# Altium PCB cam_FX3.PcbDoc (part 2 of 2)
Units mm, origin at the board's own origin, x right, y up, seen from the top; angles counter-clockwise.
Board outline 27 x 27 mm, 6 copper layers (Signal_T, GND_T, PWR, Signal_INT, GND_B, Signal_B), stack 0.816 mm thick; 79 components, 95 nets, 507 pads, 300 vias.
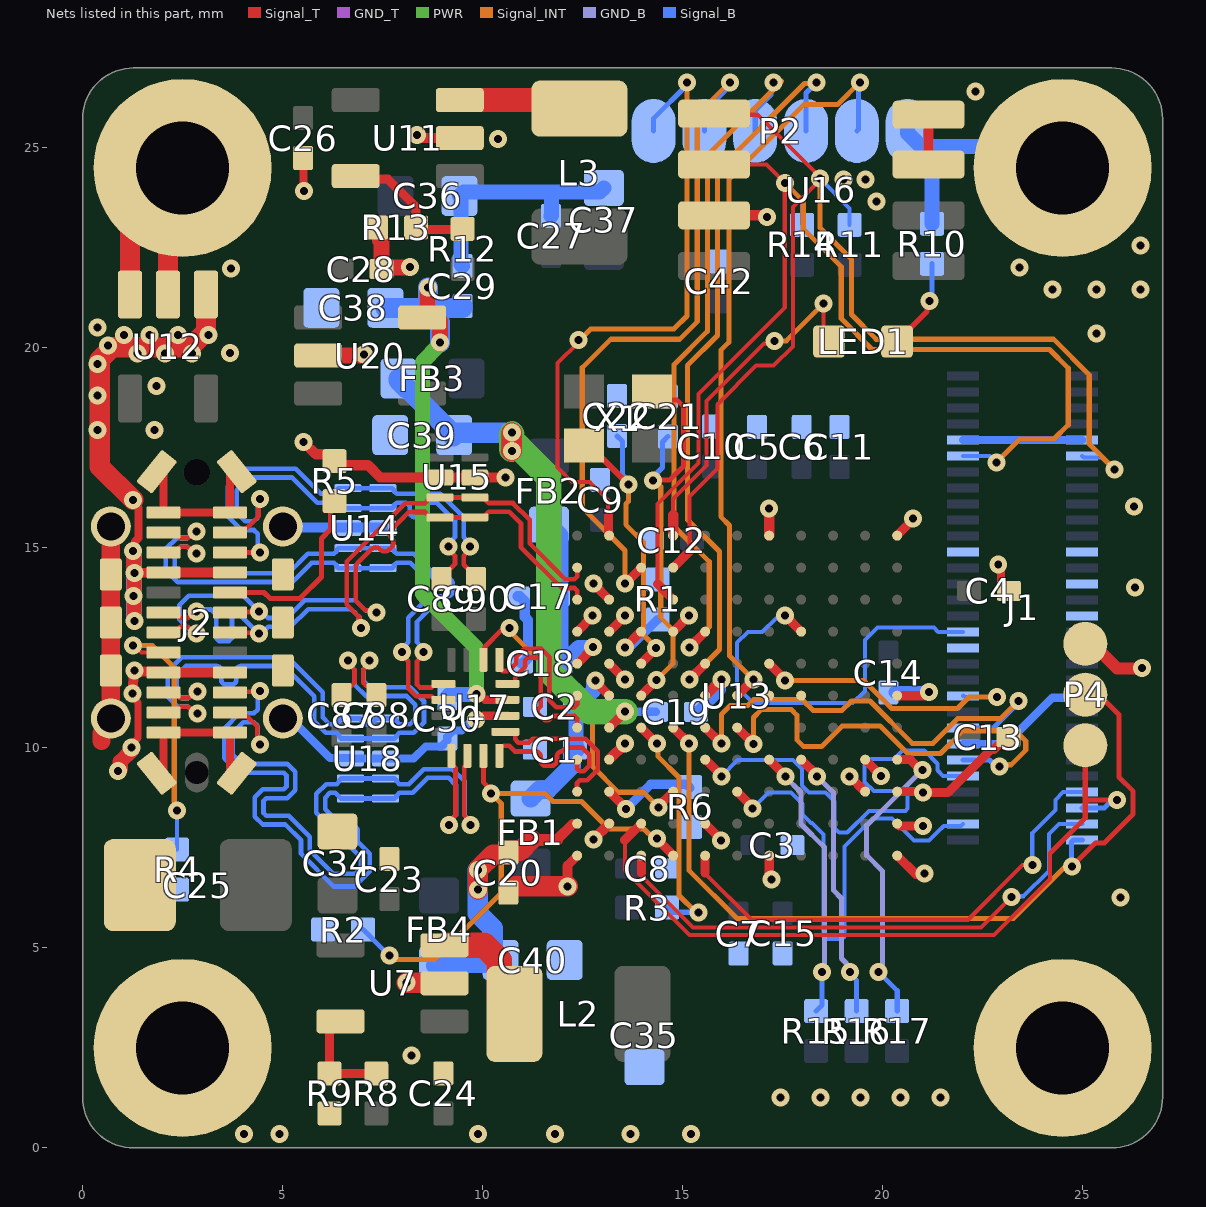
[diagram p6: the nets of this part, all layers, seen from the top]

## Via types
v1: diameter 0.45, hole 0.2, Signal_T to Signal_B, tented both sides, 300 vias

## Nets (pads, with @x,y where several pads share a name; then routed paths per layer and width w, separated by ;. In a path a pad name is that pad's centre, name@x,y a point inside that pad or via, vN(x,y) a via of type N, cw(c..) or ccw(c..) an arc to the next point about the centre after c; other vN are vias at no path point) (continued)
FPGA_D27: J1.4 U13.F3 | length 12.1
  Signal_T w0.229: U13.F3@16.364,8.909 16.364,8.904 16.751,8.517 v1(16.751,8.491)
  Signal_B w0.102: v1(16.751,8.491) 17.15,8.89 17.704,8.89 17.997,8.596 17.997,8.336 18.212,8.121 18.239,8.121 18.527,7.833 18.527,5.281 18.586,5.222 18.983,5.222 19.043,5.281 19.043,7.537 19.742,8.236 20.231,8.236 20.782,7.685 21.158,7.685 21.373,7.9 21.528,8.055 21.965,8.055 J1.4@22.01,8.1
FPGA_D28: J1.12 U13.F5 | length 11.7
  Signal_T w0.229: U13.F5@16.368,10.512 16.368,10.507 v1(16.772,10.104)
  Signal_INT w0.127: v1(16.772,10.104) 16.772,10.762 16.967,10.958 17.719,10.958 17.856,10.82 17.856,10.205 18.028,10.034 18.474,10.034 18.991,10.551 19.938,10.551 20.625,9.863 21.446,9.863 22.014,10.431 23.321,10.431 23.579,10.174 23.579,9.946 23.213,9.581 22.972,9.581 v1(22.926,9.535)
  Signal_B w0.127: J1.12@22.01,9.7 22.673,9.7 22.838,9.535 v1(22.926,9.535)
FPGA_D29: J1.7 U13.E1 | length 12.7
  Signal_T w0.102: U13.E1@15.564,7.309 15.564,6.864 16.722,5.706 22.129,5.706 23.499,7.076 v1(23.741,7.076)
  Signal_T w0.229: 15.562,6.881 U13.E1@15.562,7.301
  Signal_B w0.102: v1(23.741,7.076) 23.741,7.874 24.317,8.45 24.317,8.703 24.514,8.9 J1.7@24.99,8.9
FPGA_D30: J1.16 U13.E5 | length 11.6
  Signal_T w0.229: U13.E5@15.568,10.506 v1@15.959,10.114
  Signal_INT w0.127: v1(15.972,10.114) 15.972,10.841 16.193,11.062 16.629,11.062 16.778,11.212 17.987,11.212 18.263,10.935 18.981,10.935 19.221,11.175 19.682,11.175 20.74,10.117 21.26,10.117 21.878,10.735 22.953,10.735 v1(23.393,11.176)
  Signal_B w0.127: J1.16@22.01,10.5 22.768,10.5 23.393,11.125 v1(23.393,11.176)
FPGA_D31: J1.10 U13.E4 | length 12
  Signal_T w0.229: U13.E4@15.575,9.702 v1@15.974,9.303
  Signal_B w0.102: v1(15.974,9.293) 16.377,9.696 17.761,9.696 17.983,9.474 17.983,9.068 18.161,8.89 18.567,8.89 18.796,8.661 18.796,8.001 18.915,7.882 19.116,7.882 19.662,8.429 20.567,8.429 20.627,8.488 20.627,8.867 20.567,8.927 19.779,8.927 19.552,9.153 19.552,9.558 19.716,9.721 20.288,9.721 20.499,9.932 21.041,9.932 21.367,9.606 21.367,9.443 21.511,9.3 J1.10@22.01,9.3
FX3_SSRX_N: U13.A3 U17.1 | length 4
  Signal_T w0.117: U17.1@10.567,10.402 10.771,10.402 10.812,10.36 10.812,10.217 10.896,10.134 11.158,10.134 11.259,10.234 12.569,10.234 12.881,9.922 12.881,9.46 12.618,9.197 12.43,9.197 12.361,9.128 U13.A3@12.361,8.906
FX3_SSRX_P: U13.A4 U17.16 | length 4
  Signal_T w0.117: U17.16@10.417,9.802 10.417,10.002 10.458,10.043 10.515,10.043 10.527,10.055 10.664,10.055 10.805,9.915 11.311,9.915 ; 11.311,9.915 cw(c11.311,9.773) 11.453,9.773 11.453,9.682 ccw(c11.581,9.682) 11.581,9.554 11.712,9.554 ccw(c11.712,9.701) 11.858,9.701 11.858,9.786 cw(c11.992,9.786) 11.992,9.919 12.087,10.015 12.478,10.015 12.662,9.831 12.662,9.551 12.527,9.416 12.43,9.416 12.361,9.484 U13.A4@12.361,9.706
FX3_SSTX_N: U13.A6 U17.5 | length 4
  Signal_T w0.117: U17.5@10.42,12.205 10.42,12.005 10.499,11.927 10.65,11.927 10.842,12.118 10.842,12.285 11.039,12.482 11.472,12.482 11.669,12.285 11.669,11.194 11.844,11.019 12.296,11.019 12.364,11.088 U13.A6@12.364,11.309
FX3_SSTX_P: U13.A5 U17.4 | length 4
  Signal_T w0.117: U17.4@10.62,11.605 10.778,11.605 10.819,11.646 10.819,11.786 10.869,11.836 11.061,12.027 11.061,12.194 11.129,12.263 11.381,12.263 11.45,12.194 11.45,11.043 11.378,10.971 11.378,10.869 11.55,10.696 11.65,10.696 11.754,10.8 12.296,10.8 12.364,10.731 U13.A5@12.364,10.509
GND: C1.1 C2.1 C3.1 C4.1 C5.1 C6.1 C7.1 C8.1 C9.1 C10.1 C11.1 C12.1 C13.1 C14.1 C15.1 C17.1 C18.1 C19.1 C20.1 C21.2 C22.2 C23.1 C24.1 C25.2 C26.1 C27.1 C28.1 C29.1 C30.1 C34.2 C35.2 C36.2 C37.2 C38.2 C39.2 C40.2 C42.1 J1.14 J1.19 J1.25 J1.26 J1.29 J1.33 J1.37 J1.38 J1.51 J1.52 J2.0 J2.A1 J2.A12 J2.B1 J2.B12 P2.1 P4.3 pad.Q5 pad.Q6 pad.Q7 pad.Q8 R1.1 R2.2 R4.2 R5.2 R6.1 R9.2 R10.2 R13.1 U7.2 U11.2 U12.2 U12.3 U13.A1 U13.A8 U13.B2 U13.B4 U13.B7 U13.B8 U13.B9 U13.D8 U13.E2 U13.E6 U13.G1 U13.G11 U13.K3 U13.K4 U13.L1 U13.L2 U13.L3 U13.L6 U13.L11 U14.3 U14.8 U15.3 U15.8 U16.3 U16.4 U16.7 U17.2 U18.3 U18.8 U20.2 | length 83.5
  Signal_T w0.203: J2.0@1.853,9.369 2.023,9.369 J2.B1@2.023,10.389 J2.A12@3.683,10.389 3.683,9.369 J2.0@3.853,9.369 ; J2.0@1.853,16.909 2.023,16.909 J2.B12@2.023,15.889 J2.A1@3.683,15.889 3.683,16.909 J2.0@3.853,16.909 ; C26.1@5.512,24.748 5.524,24.735 5.524,23.939 v1(5.537,23.927) ; v1@9.854,10.707 9.921,10.707 10.019,10.805 U17.2@10.62,10.805 ; v1(22.89,14.589) 22.89,14.522 22.957,14.455 22.957,14.078 23.029,14.006 C4.1@23.155,14.006
  Signal_T w0.229: 12.124,7.045 12.124,7.069 U13.A1@12.364,7.309 ; U13.A8@12.364,12.909 v1@12.745,13.29 ; v1@12.771,14.103 U13.B9@13.164,13.709 ; U13.B4@13.164,9.709 U13.B4@13.184,9.709 ; U13.B7@13.164,12.109 13.558,11.716 v1@13.583,11.716 ; U13.B8@13.164,12.909 13.562,13.307 v1(13.562,13.309) v1@13.562,13.315 ; U13.D8@14.764,12.909 15.146,13.291 v1@15.158,13.291 ; U13.E2@15.564,8.109 15.564,8.104 15.964,7.704 v1(15.964,7.687) ; U13.G1@17.164,7.309 17.166,7.308 17.166,6.822 17.216,6.772 v1(17.216,6.712) ; v1(19.171,9.29) 19.178,9.29 19.559,8.909 U13.K3@19.564,8.909 ; U13.K4@19.564,9.709 19.564,9.704 19.955,9.313 v1(19.955,9.294) ; U13.L1@20.364,7.309 20.834,6.84 21.023,6.84 v1(21.041,6.858) ; U13.L2@20.364,8.109 20.422,8.052 v1(21.006,8.052) ; U13.L3@20.364,8.909 20.368,8.913 20.982,8.913 v1(21.006,8.89) 21.641,8.89 22.716,9.965 22.783,9.965 23.092,10.274 C13.1@23.142,10.274 ; U13.L6@20.364,11.309 20.369,11.305 21.021,11.305 v1@21.026,11.3 ; U13.L11@20.364,15.309 20.364,15.315 20.756,15.707 v1(20.756,15.733)
  Signal_T w0.254: v1(5.523,17.651) 5.831,17.343 6.126,17.343 R5.2@6.299,17.17 6.401,17.069 7.137,17.069 7.442,16.764 U15.3@8.93,16.764 U15.8@9.804,16.764 v1(10.566,16.764) ; v1(8.357,25.324) 8.41,25.324 8.486,25.248 U11.2@9.428,25.248 ; v1(12.124,6.541) 12.124,7.045 ; v1(12.771,7.709) 12.771,7.716 U13.B2@13.164,8.109 ; U13.B4@13.169,9.717 v1@13.562,10.11 ; U13.E6@15.574,11.313 v1@15.968,11.706 ; U16.7@15.786,23.317 17.006,23.317 17.054,23.269 v1(17.107,23.269) ; v1(17.16,15.991) 17.164,15.987 U13.G11@17.164,15.309 ; U16.3@21.146,24.587 U16.4@21.146,25.832
  Signal_T w0.3: P4.3@25.066,12.605 25.248,12.605 25.864,11.989 26.481,11.989 v1(26.488,11.997)
  Signal_T w0.4: U20.2@5.888,19.812 6.997,19.812 7.022,19.837 v1(7.036,19.837) ; R13.1@7.337,22.988 7.437,22.888 7.437,22.688 7.468,22.658 C28.1@7.468,21.999 ; C28.1@7.468,21.974 7.506,22.012 8.169,22.012 v1(8.179,22.022)
  Signal_T w0.457: 0.472,10.181 J2.0@0.472,10.361 ; J2.0@0.703,10.592 J2.0@0.703,10.739 J2.0@0.703,11.939 J2.0@0.703,13.139 J2.0@0.703,14.339 J2.0@0.703,15.539
  Signal_T w0.5: U12.3@1.184,21.341 1.184,23.184 cw(c2.134,23.184) 2.134,24.134 U12.2@2.134,21.341
  Signal_T w0.508: v1(8.099,4.133) 9.047,4.133 U7.2@9.047,4.116 ; C20.1@10.643,6.383 10.643,6.425 10.647,6.429 10.689,6.429 10.8,6.541 v1(12.124,6.541)
  Signal_B w0.203: J2.0@5.003,10.739 5.197,10.739 6.183,9.752 6.68,9.752 U18.3@6.695,9.738 U18.8@7.569,9.738 8.277,9.738 8.577,10.038 8.968,10.038 9.116,10.186 C30.1@9.116,10.236 9.116,10.286 9.265,10.435 9.478,10.435 9.703,10.66 9.782,10.66 v1(9.829,10.707) ; C14.1@20.295,11.387 C14.1@20.303,11.396 ; v1@21.116,11.396 21.158,11.354 v1(21.158,11.405) ; J1.14@22.01,10.1 23.089,10.1 24.246,11.258 24.948,11.258 J1.19@24.99,11.3 ; J1.52@22.01,17.7 J1.51@24.99,17.7
  Signal_B w0.254: J2.0@5.003,15.539 5.025,15.516 7.481,15.516 U14.3@7.503,15.494 ; C17.1@10.879,13.792 10.929,13.792 11.052,13.669 11.052,13.281 11.13,13.203 11.13,12.388 11.128,12.386 11.128,12.239 11.005,12.116 C18.1@10.955,12.116
  Signal_B w0.3: C19.1@15.336,10.903 15.386,10.903 15.939,11.457 15.939,11.684 v1(15.968,11.713)
  Signal_B w0.305: C14.1@20.303,11.396 v1@21.116,11.396
  Signal_B w0.381: C29.1@9.5,22.048 9.461,22.086 9.461,23.762 C36.2@9.423,23.8 9.525,23.901 11.721,23.901 ; C27.1@11.709,23.301 11.721,23.312 11.721,23.901 ; C37.2@13.03,24.003 12.929,23.901 11.721,23.901 ; P2.1@20.625,25.425 20.625,25.37 20.957,25.038 21.361,25.038 ; R10.2@21.234,23.106 21.234,24.911 21.361,25.038 ; pad.Q6@24.5,24.5 23.962,25.038 21.361,25.038
  other v1: 4.039,0.356 4.928,0.356 9.881,0.356 11.811,0.356 13.691,0.356 15.215,0.356 17.45,1.262 18.45,1.262 19.45,1.262 20.45,1.262 21.45,1.262 8.224,2.314 25.95,6.262 13.562,10.117 13.564,11.709 12.745,13.309 15.164,13.309 26.314,14.01 12.771,14.109 26.283,16.042 25.35,20.362 24.25,21.462 25.35,21.462 26.45,21.462 23.425,22.012 26.45,22.562 19.85,23.662 19.025,24.212 19.575,24.212 10.389,25.222 22.325,26.412
GPIO21: J1.20 U13.G7 | length 7.2
  Signal_T w0.229: U13.G7@17.164,12.109 17.164,12.104 17.564,11.704 v1(17.564,11.684)
  Signal_INT w0.127: v1(17.564,11.684) 19.533,11.684 20.228,10.989 21.871,10.989 22.159,11.278 v1(22.86,11.278)
  Signal_B w0.102: J1.20@22.01,11.3 22.016,11.306 22.044,11.278 v1(22.86,11.278)
GPIO22: U13.G6 | length 0
  Signal_T w0.229: U13.G6@17.159,11.309 U13.G6@17.164,11.309
GPIO24: J1.28 U13.H8 | length 10.5
  Signal_T w0.229: v1@17.571,13.303 U13.H8@17.964,12.909
  Signal_B w0.102: v1(17.564,13.309) 17.497,13.242 17.329,13.242 16.99,12.903 16.631,12.903 16.359,12.631 16.359,11.523 16.76,11.123 19.251,11.123 19.558,11.43 19.558,12.697 19.869,13.008 21.282,13.008 21.39,12.9 J1.28@22.01,12.9
GPIO26: U13.H6
LDO_3V3: C29.2 C30.2 C38.1 U17.3 U20.5 | length 15.7
  Signal_T w0.203: 10.056,11.205 U17.3@10.62,11.205
  Signal_T w0.4: U20.5@8.488,20.762 8.526,20.762 8.626,20.862 8.626,21.504 v1(8.636,21.514) ; v1@8.93,20.113 U20.5@8.93,20.674
  PWR w0.381: v1(8.936,20.138) 8.936,20.119 8.902,20.085 8.902,20.058 8.495,19.652 8.495,13.851 9.845,12.501 v1(9.845,11.35)
  Signal_B w0.381: C30.2@9.116,11.236 9.116,11.277 9.176,11.336 9.831,11.336 v1(9.845,11.35)
  Signal_B w0.5: C38.1@7.569,21.006 8.585,21.006 8.936,20.655 v1(8.936,20.138) ; v1@8.638,21.512 8.638,20.995 9.447,20.995 9.45,20.998 9.5,20.998 C29.2@9.5,21.048
LED: LED1.A U13.D11 | length 8.6
  Signal_T w0.102: 14.764,15.824 14.764,16.226 15.596,17.057 15.596,18.674 17.034,20.113 17.23,20.113 v1(17.296,20.179) ; v1(18.518,21.106) 18.518,20.302 LED1.A@18.66,20.16
  Signal_T w0.254: U13.D11@14.764,15.309 14.764,15.824
  Signal_INT w0.127: v1(17.296,20.179) 17.592,20.179 v1(18.518,21.106)
NetC1_2: C1.2 C2.2 FB1.2 U13.B6 | length 4.3
  Signal_T w0.229: v1(12.821,11.692) 12.821,11.652 U13.B6@13.164,11.309
  Signal_B w0.381: C1.2@12.334,9.985 12.334,11.008 12.779,11.454 12.779,11.649 v1(12.821,11.692)
  Signal_B w0.457: FB1.2@11.201,8.736 11.423,8.957 11.633,8.957 12.234,9.558 12.234,9.935 12.277,9.978 C1.2@12.334,9.978
NetC17_2: C17.2 C18.2 FB2.2 U13.A7 | length 6
  Signal_T w0.229: U13.A7@12.364,12.109 12.756,12.501 v1(12.756,12.523)
  Signal_B w0.381: FB2.2@11.659,15.584 11.696,15.584 11.955,15.324 11.955,13.852 C17.2@11.896,13.792 ; C17.2@11.879,13.792 C17.2@11.896,13.792 ; C17.2@11.955,13.792 11.955,12.987 ; v1(12.756,12.523) 12.743,12.509 12.399,12.509 12.005,12.116 C18.2@11.955,12.116 11.955,12.987 ; C17.2@11.896,13.792 11.955,13.733 11.955,12.987
NetC19_2: C19.2 C39.1 FB3.2 U13.B5 | length 14.5
  Signal_T w0.229: U13.B5@13.164,10.509 v1@13.558,10.903
  Signal_T w0.508: v1@10.719,17.424 10.729,17.434 v1(10.729,17.882)
  PWR w0.635: v1@10.724,17.469 v1@10.724,17.847 ; v1@10.862,17.568 11.648,16.782 11.648,11.938 12.678,10.909 v1(13.564,10.909)
  Signal_B w0.203: v1(13.564,10.909) 13.567,10.906 14.333,10.906 C19.2@14.336,10.903
  Signal_B w0.508: FB3.2@7.895,19.238 7.895,19.188 8.091,18.992 8.119,18.992 9.265,17.846 9.265,17.796 9.351,17.882 v1(10.729,17.882) ; v1@10.738,17.424 v1@10.738,17.917
  other v1: 10.729,17.424
NetC20_2: C20.2 C40.1 FB4.2 U13.A2 | length 7.7
  Signal_T w0.229: U13.A2@12.254,8.1 12.355,8.1 U13.A2@12.364,8.109
  Signal_T w0.254: 11.856,7.703 U13.A2@12.254,8.1
  Signal_T w0.305: 11.221,7.703 11.856,7.703
  Signal_T w0.508: v1(9.882,6.459) v1(9.883,6.953) 10.268,7.337 10.639,7.337 10.643,7.341 10.643,7.425 10.647,7.429 10.948,7.429 11.221,7.703
  Signal_B w0.508: FB4.2@8.839,4.56 8.909,4.63 10.383,4.63 C40.1@10.452,4.699 10.256,4.895 10.256,5.492 9.879,5.869 v1@9.879,6.952
NetC21_1: C21.1 U13.C6 X1.1 | length 10.5
  Signal_T w0.127: X1.1@14.238,18.912 14.445,18.705 14.854,18.705 15.025,18.534 15.025,17.05 14.676,16.701 14.27,16.701 v1(14.26,16.691)
  Signal_T w0.229: U13.C6@13.957,11.305 v1@14.343,11.69
  Signal_INT w0.127: v1(14.26,16.691) 14.297,16.691 14.453,16.535 14.453,13.259 14.755,12.957 14.755,12.106 v1(14.343,11.694)
  Signal_B w0.127: v1(14.26,16.691) 14.26,16.778 14.494,17.012 14.494,17.652 C21.1@14.63,17.788
NetC22_1: C22.1 U13.C7 X1.3 | length 7.7
  Signal_T w0.152: X1.3@12.613,17.435 12.799,17.435 v1(13.652,16.581)
  Signal_T w0.229: U13.C7@13.964,12.109 13.964,12.115 14.339,12.49 v1(14.339,12.498)
  Signal_INT w0.127: v1(13.652,16.581) 13.648,16.577 13.648,16.166 13.58,16.098 13.58,15.584 14.021,15.143 14.021,12.827 14.339,12.509 v1(14.339,12.498)
  Signal_B w0.127: C22.1@13.36,17.802 13.497,17.665 13.497,16.824 13.652,16.669 v1(13.652,16.581)
NetJ2_A5: J2.A5 R5.1 | length 4.6
  Signal_T w0.127: J2.A5@3.683,13.889 4.534,13.889 4.682,13.741 5.436,13.741 5.969,14.275 5.969,15.24 6.198,15.469 6.198,16.069 R5.1@6.299,16.17
NetJ2_B5: J2.B5 R4.1 | length 6.7
  Signal_T w0.102: v1(1.253,12.56) 1.302,12.56 1.474,12.389 J2.B5@2.023,12.389
  Signal_INT w0.127: v1(1.253,12.56) 1.742,12.56 2.291,12.011 2.291,8.669 2.3,8.659 2.3,8.495 v1(2.362,8.433)
  Signal_B w0.102: R4.1@2.362,7.46 v1(2.362,8.433)
NetL2_1: L2.1 U7.3 | length 3
  Signal_T w0.635: U7.3@9.047,5.066 9.049,5.065 10.041,5.065 10.413,4.693 10.413,3.735 L2.1@10.795,3.353
NetL3_1: L3.1 U11.3 | length 3
  Signal_T w0.6: U11.3@9.428,26.198 9.86,26.198 9.867,26.205 12.301,26.205 L3.1@12.421,26.086
NetLED1_K: LED1.K R10.1 | length 2.3
  Signal_T w0.127: LED1.K@20.36,20.16 21.11,20.911 21.11,21.118 v1(21.172,21.179)
  Signal_B w0.127: v1(21.172,21.179) 21.234,21.242 R10.1@21.234,22.106
NetR1_2: R1.2 U13.C8 | length 1.7
  Signal_T w0.229: v1@13.562,12.503 v1(13.562,12.509) 13.562,12.513 U13.C8@13.947,12.899 ; U13.C8@13.948,12.899 13.959,12.909 U13.C8@13.964,12.909
  Signal_B w0.229: v1(13.562,12.509) 13.604,12.551 13.712,12.551 R1.2@14.376,13.216
NetR3_2: R3.2 U13.C5 | length 6.1
  Signal_T w0.229: U13.C5@13.964,10.509 v1@14.376,10.098
  Signal_INT w0.127: v1(14.364,10.109) 14.38,10.093 14.38,9.792 14.91,9.262 14.91,6.315 15.332,5.893 v1(15.402,5.893)
  Signal_B w0.127: R3.2@14.615,6.007 14.73,5.893 v1(15.402,5.893)
NetR6_2: R6.2 U13.B3 | length 2.5
  Signal_T w0.229: U13.B3@13.164,8.909 13.584,8.489 13.584,8.483 v1(13.589,8.478)
  Signal_B w0.229: v1(13.589,8.478) 13.589,8.484 14.199,9.093 15.093,9.093 R6.2@15.186,9
NetR8_1: R8.1 R9.1 U7.5 | length 2.6
  Signal_T w0.229: U7.5@6.447,3.09 ccw(c6.447,2.815) 6.172,2.815 R9.1@6.172,1.864 R8.1@7.341,1.864
NetR12_1: R12.1 R13.2 U11.5 | length 3.5
  Signal_T w0.229: U11.5@6.828,24.221 7.63,24.221 8.337,23.514 8.337,22.988 8.367,22.958 R12.1@9.47,22.958
PMOD0: R15.1 U13.G4 | length 6.9
  Signal_T w0.229: U13.G4@17.164,9.709 17.164,9.704 17.566,9.302 v1(17.566,9.281)
  GND_B w0.127: v1(17.566,9.281) 17.962,8.885 17.962,8.098 18.542,7.518 18.542,4.46 v1(18.486,4.404)
  Signal_B w0.127: R15.1@18.337,3.423 18.486,3.572 v1(18.486,4.404)
PMOD1: R16.1 U13.H4 | length 6.9
  Signal_T w0.229: U13.H4@17.964,9.709 v1@18.384,9.29
  GND_B w0.127: v1(18.364,9.29) 18.771,8.883 18.771,6.441 18.972,6.24 18.972,4.738 19.226,4.484 v1@19.226,4.404
  Signal_B w0.127: v1@19.226,4.404 19.226,4.317 19.351,4.192 R16.1@19.351,3.423
  other v1: 19.19,4.404
PMOD2: R17.1 U13.L4 | length 7.7
  Signal_T w0.229: U13.L4@20.364,9.709 20.691,9.709 20.953,9.448 v1(20.993,9.448)
  GND_B w0.127: v1(19.893,4.404) 19.893,4.492 19.997,4.595 19.997,6.922 19.601,7.317 19.601,8.056 v1(20.993,9.448)
  Signal_B w0.127: v1(19.893,4.404) 20.365,3.933 R17.1@20.365,3.423
SCL_1V8: J1.50 R14.2 U13.D9 U16.6 | length 29.8
  Signal_T w0.102: 14.371,14.104 14.371,16.105 15.392,17.127 15.392,18.847 17.554,21.008 v1(17.554,24.129) 17.096,24.587 U16.6@15.786,24.587
  Signal_T w0.229: 14.371,14.103 U13.D9@14.764,13.709
  Signal_INT w0.127: v1(17.554,24.129) 18.016,23.667 18.016,22.98 18.965,22.03 18.965,20.735 19.736,19.964 24.17,19.964 24.64,19.495 24.64,18.081 24.282,17.724 23.43,17.724 v1(22.847,17.141)
  Signal_B w0.102: v1(17.554,24.129) 17.983,23.7 R14.2@17.983,23.081 ; J1.50@22.01,17.3 22.688,17.3 v1(22.847,17.141)
SDA_1V8: J1.49 R11.2 U13.D10 U16.5 | length 30.1
  Signal_T w0.102: 15.173,14.918 15.173,16.289 15.875,16.991 15.875,18.593 16.84,19.558 17.272,19.558 17.755,20.041 17.755,23.52 18.37,24.135 v1@18.37,24.236 ; U16.5@15.786,25.857 15.811,25.832 16.872,25.832 v1@18.431,24.272
  Signal_T w0.127: v1(18.431,24.236) v1@18.431,24.272
  Signal_T w0.229: U13.D10@14.764,14.509 15.173,14.918
  Signal_INT w0.127: v1(18.431,24.236) 18.431,23.005 19.219,22.217 19.219,20.84 19.841,20.218 24.275,20.218 25.166,19.327 25.166,17.597 v1(25.799,16.964)
  Signal_B w0.102: v1(18.431,24.236) 19.177,23.491 R11.2@19.177,23.081 ; J1.49@24.99,17.3 25.029,17.261 25.502,17.261 v1(25.799,16.964)
SS_D_N: J2.A7 J2.B7 U13.A10 U15.4 U15.7 | length 17.7
  Signal_T w0.117: J2.B7@2.023,13.389 2.298,13.389 2.439,13.248 2.624,13.248 2.786,13.41 v1(2.845,13.41) ; J2.A7@3.683,12.889 3.694,12.878 4.4,12.878 v1(4.411,12.868) ; v1(6.96,13.005) 6.908,13.057 6.908,13.285 6.606,13.587 6.606,14.662 8.062,16.119 8.559,16.119 8.628,16.188 8.628,16.199 8.693,16.264 U15.4@8.93,16.264 U15.7@9.804,16.264 10.042,16.264 10.083,16.223 10.083,16.192 10.152,16.123 10.759,16.123 11.177,15.705 11.177,15.113 12.071,14.219 12.296,14.219 12.364,14.288 U13.A10@12.364,14.509
  Signal_B w0.117: v1(2.845,13.41) 2.897,13.462 3.207,13.462 3.338,13.331 3.338,12.743 3.407,12.675 3.658,12.675 3.734,12.751 3.734,13.286 3.803,13.354 3.9,13.354 v1@4.387,12.868 ; v1@4.284,12.911 4.328,12.868 v1@4.387,12.868 ; v1(6.96,13.005) 6.908,13.057 6.908,13.285 6.807,13.386 6.721,13.472 5.639,13.472 5.196,13.029 4.646,13.029 4.485,12.868 v1(4.411,12.868) v1@4.387,12.868
SS_D_P: J2.A6 J2.B6 U13.A9 U15.5 U15.6 | length 17.7
  Signal_T w0.117: J2.B6@2.023,12.889 2.298,12.889 2.439,13.029 2.624,13.029 2.786,12.868 v1(2.845,12.868) ; J2.A6@3.683,13.389 3.694,13.399 4.4,13.399 v1(4.411,13.41) ; v1(7.343,13.388) 7.291,13.44 7.062,13.44 6.825,13.678 6.825,14.572 6.895,14.643 7.217,14.965 cw(c7.33,14.852) 7.442,14.965 ccw(c7.555,15.076) 7.667,14.964 7.723,15.02 ccw(c7.611,15.132) 7.723,15.245 cw(c7.835,15.357) 7.722,15.47 7.963,15.71 8.153,15.9 8.557,15.9 8.693,15.764 U15.5@8.93,15.764 U15.6@9.804,15.764 10.042,15.764 10.083,15.805 10.083,15.836 10.152,15.905 10.668,15.905 10.958,15.615 10.958,15.022 11.98,14 12.296,14 12.364,13.931 U13.A9@12.364,13.709
  Signal_B w0.117: v1(2.845,12.868) 2.76,12.868 2.422,13.205 2.422,13.576 2.655,13.809 4.011,13.809 v1(4.411,13.41) 4.485,13.41 4.646,13.248 5.105,13.248 5.548,13.691 6.812,13.691 7.062,13.44 7.291,13.44 v1(7.343,13.388)
SS_RX1_N: J2.B10 U14.4 U14.7 U17.9 | length 13.7
  Signal_T w0.117: J2.B10@2.023,14.889 2.298,14.889 2.439,15.029 2.624,15.029 2.786,14.868 v1(2.845,14.868) ; v1@8.51,12.406 v1(8.521,12.406) 8.521,12.332 8.359,12.17 8.359,11.588 8.433,11.514 8.73,11.514 8.82,11.605 U17.9@9.02,11.605
  Signal_B w0.117: v1(2.845,14.868) 2.771,14.868 2.61,15.029 2.444,15.029 2.3,14.886 2.3,14.535 2.469,14.367 5.146,14.367 5.633,14.853 6.282,14.853 6.351,14.922 6.351,14.953 6.392,14.994 U14.7@6.629,14.994 U14.4@7.503,14.994 7.741,14.994 7.782,14.953 7.782,14.922 7.851,14.853 8.276,14.853 8.7,14.43 8.7,14.371 ccw(c8.834,14.371) 8.834,14.237 9.119,14.237 cw(c9.119,14.102) 9.254,14.102 9.254,13.923 cw(c9.119,13.923) 9.119,13.789 8.834,13.789 ccw(c8.834,13.655) 8.7,13.655 8.7,13.501 8.615,13.415 8.359,13.16 8.359,12.641 8.521,12.479 v1(8.521,12.406)
SS_RX1_P: J2.B11 U14.5 U14.6 U17.10 | length 13.7
  Signal_T w0.117: J2.B11@2.023,15.389 2.298,15.389 2.439,15.248 2.624,15.248 2.786,15.41 v1(2.845,15.41) ; v1@8.14,12.406 v1(7.979,12.406) 7.979,12.332 8.14,12.17 8.14,11.498 8.342,11.296 8.73,11.296 8.82,11.205 U17.10@9.02,11.205
  Signal_B w0.117: v1(2.845,15.41) 2.771,15.41 2.61,15.248 2.353,15.248 2.081,14.976 2.081,14.445 2.378,14.148 5.237,14.148 5.724,14.635 6.282,14.635 6.351,14.566 6.351,14.535 6.392,14.494 U14.6@6.629,14.494 U14.5@7.503,14.494 7.741,14.494 7.782,14.535 7.782,14.566 7.851,14.635 8.186,14.635 8.481,14.339 8.481,13.591 8.14,13.25 8.14,12.641 7.979,12.479 v1(7.979,12.406)
SS_RX2_N: J2.A10 U17.13 U18.1 U18.10 | length 19.5
  Signal_T w0.117: J2.A10@3.683,11.389 3.701,11.407 4.421,11.407 v1(4.438,11.425) ; v1(9.16,8.077) 9.16,8.151 9.322,8.312 9.322,9.504 9.22,9.605 U17.13@9.22,9.805
  Signal_B w0.117: v1(4.438,11.425) 4.375,11.361 4.375,10.956 4.284,10.865 3.921,10.865 3.537,10.48 3.537,9.742 3.897,9.382 5.027,9.382 5.096,9.314 5.096,9.035 5.027,8.966 4.502,8.966 4.305,8.769 4.305,8.284 4.502,8.087 5.067,8.087 5.461,7.692 5.461,7.354 6.277,6.537 6.802,6.537 7.178,6.913 7.178,7.356 6.873,7.66 6.873,7.966 6.726,8.113 6.42,8.113 6.063,8.47 6.063,8.76 6.182,8.878 6.317,8.878 6.458,8.738 U18.1@6.695,8.738 U18.10@7.569,8.738 7.807,8.738 7.848,8.779 7.848,8.809 7.917,8.878 8.248,8.878 8.623,9.253 9.154,9.253 9.333,9.074 9.333,8.324 9.16,8.151 v1(9.16,8.077)
SS_RX2_P: J2.A11 U17.14 U18.2 U18.9 | length 19.4
  Signal_T w0.117: J2.A11@3.683,10.889 3.774,10.797 4.109,10.797 4.365,10.541 4.365,10.146 v1(4.428,10.082) ; U17.14@9.62,9.805 9.62,9.605 9.541,9.525 9.541,8.312 9.702,8.151 v1(9.702,8.077)
  Signal_B w0.117: v1(4.428,10.082) 4.365,10.146 4.365,10.565 4.284,10.646 4.012,10.646 3.756,10.39 3.756,9.833 3.988,9.601 5.118,9.601 5.315,9.404 5.315,8.944 5.118,8.747 4.593,8.747 4.524,8.679 4.524,8.375 4.593,8.306 5.157,8.306 5.68,7.783 5.68,7.445 6.271,6.854 6.809,6.854 6.959,7.003 6.959,7.265 5.844,8.38 5.844,8.85 6.091,9.097 6.348,9.097 6.416,9.166 6.416,9.196 6.458,9.238 U18.2@6.695,9.238 U18.9@7.569,9.238 7.807,9.238 7.848,9.196 7.848,9.166 7.917,9.097 8.157,9.097 8.532,9.472 9.245,9.472 9.552,9.165 9.552,8.312 9.702,8.162 v1(9.702,8.077)
SS_TX1_N: C90.1 J2.A3 U14.1 U14.10 | length 11.5
  Signal_T w0.117: J2.A3@3.683,14.889 3.684,14.887 v1(4.438,14.886) v1(4.438,14.886) ; v1(9.688,15.037) 9.688,14.963 9.526,14.802 9.526,14.583 9.642,14.468 9.646,14.468 9.837,14.276 C90.1@9.837,14.226
  Signal_B w0.117: v1(4.438,14.886) 4.375,14.95 4.375,15.357 4.284,15.448 3.977,15.448 3.632,15.793 3.632,16.538 4.076,16.982 5.324,16.982 5.953,16.353 6.282,16.353 6.351,16.422 6.351,16.453 6.392,16.494 U14.10@6.629,16.494 U14.1@7.503,16.494 7.741,16.494 7.782,16.453 7.782,16.422 7.851,16.353 8.942,16.353 9.526,15.769 9.526,15.272 9.688,15.11 v1(9.688,15.037)
SS_TX1_P: C89.1 J2.A2 U14.2 U14.9 | length 11.5
  Signal_T w0.117: J2.A2@3.683,15.389 3.774,15.48 4.085,15.48 4.397,15.792 4.397,16.188 v1(4.438,16.229) ; C89.1@8.974,14.226 8.974,14.276 9.165,14.468 9.182,14.468 9.308,14.593 9.308,14.802 9.146,14.963 v1(9.146,15.037)
  Signal_B w0.117: v1(4.438,16.229) 4.375,16.165 4.375,15.758 4.284,15.667 4.068,15.667 3.851,15.884 3.851,16.447 4.167,16.763 5.234,16.763 5.862,16.135 6.282,16.135 6.351,16.066 6.351,16.035 6.392,15.994 U14.9@6.629,15.994 U14.2@7.503,15.994 7.741,15.994 7.782,16.035 7.782,16.066 7.851,16.135 8.046,16.135 cw(c8.046,16.002) 8.179,16.002 8.179,15.9 ccw(c8.306,15.9) 8.306,15.773 8.433,15.773 ccw(c8.433,15.9) 8.56,15.9 8.56,16.003 cw(c8.692,16.003) 8.641,16.126 cw(c8.686,16.017) 8.686,16.135 8.851,16.135 9.308,15.678 9.308,15.272 9.146,15.11 v1(9.146,15.037)
SS_TX2_N: C88.1 J2.B3 U18.4 U18.7 | length 14.3
  Signal_T w0.117: J2.B3@2.023,11.389 2.298,11.389 2.439,11.248 2.635,11.248 2.797,11.41 v1(2.87,11.41) ; v1(7.177,12.192) 7.177,12.118 7.016,11.957 7.016,11.763 7.016,11.631 7.084,11.563 7.152,11.563 C88.1@7.344,11.371
  Signal_B w0.117: v1(2.87,11.41) 2.797,11.41 2.635,11.248 2.469,11.248 2.348,11.369 2.348,11.82 2.576,12.048 2.921,12.048 3.351,12.048 cw(c3.351,11.93) 3.468,11.93 3.468,11.697 ccw(c3.58,11.697) 3.58,11.586 3.728,11.586 ccw(c3.728,11.697) 3.84,11.697 3.84,11.93 cw(c3.957,11.93) 3.957,12.048 4.572,12.048 5.037,12.048 5.787,11.297 5.787,10.672 6.081,10.378 6.348,10.378 6.416,10.309 6.416,10.279 6.458,10.238 U18.4@6.695,10.238 U18.7@7.569,10.238 7.807,10.238 7.848,10.279 7.848,10.309 7.917,10.378 8.275,10.378 8.469,10.572 8.533,10.636 8.533,11.174 8.19,11.516 7.176,11.516 7.016,11.677 7.016,11.957 7.177,12.118 v1(7.177,12.192)
SS_TX2_P: C87.1 J2.B2 U18.5 U18.6 | length 14.1
  Signal_T w0.117: J2.B2@2.023,10.889 2.298,10.889 2.439,11.029 2.635,11.029 2.797,10.868 v1(2.87,10.868) ; C87.1@6.469,11.371 6.66,11.563 6.728,11.563 6.797,11.631 6.797,11.854 ; v1(6.635,12.192) 6.635,12.118 6.797,11.957 6.797,11.854
  Signal_B w0.117: v1(2.87,10.868) 2.797,10.868 2.635,11.029 2.378,11.029 2.129,11.279 2.129,11.913 2.482,12.267 5.127,12.267 6.006,11.388 6.006,10.763 6.172,10.597 6.348,10.597 6.416,10.666 6.416,10.696 6.458,10.738 6.933,10.738 6.974,10.696 6.974,10.667 7.043,10.598 7.222,10.598 7.29,10.667 7.29,10.696 7.332,10.738 7.807,10.738 7.848,10.696 7.848,10.666 7.917,10.597 8.184,10.597 8.314,10.727 8.314,11.083 8.099,11.297 7.085,11.297 6.797,11.586 6.797,11.957 6.635,12.118 v1(6.635,12.192)
UART_CTS: J1.3 U13.C1 | length 14.1
  Signal_T w0.102: U13.C1@13.964,7.309 13.964,6.812 15.263,5.513 22.455,5.513 v1(23.216,6.274)
  Signal_T w0.229: 13.97,6.879 U13.C1@13.97,7.299
  Signal_B w0.102: v1(23.216,6.274) 23.236,6.294 23.526,6.294 24.155,6.923 24.155,7.85 24.408,8.103 24.987,8.103 J1.3@24.99,8.1
UART_RX: J1.1 P4.2 U13.D5 | length 20.9
  Signal_T w0.127: v1(24.734,7.042) 25.321,7.629 25.544,7.629 26.264,8.348 26.264,8.915 25.908,9.271 25.908,10.832 25.592,11.149 25.252,11.149 P4.2@25.066,11.335
  Signal_T w0.229: U13.D5@14.764,10.509 v1@15.185,10.089
  Signal_INT w0.127: v1(15.164,10.109) 15.164,6.934 16.358,5.74 23.27,5.74 v1@24.575,7.045
  Signal_B w0.127: v1@24.723,7.045 24.723,7.648 24.775,7.7 J1.1@24.99,7.7
UART_TX: J1.5 P4.1 U13.C2 | length 19.1
  Signal_T w0.102: 13.554,7.698 13.554,6.932 15.166,5.32 22.781,5.32 24.185,6.724 24.185,7.371 ; 13.697,7.842 U13.C2@13.964,8.109
  Signal_T w0.127: 24.185,7.371 25.066,8.251 25.066,8.636 ; P4.1@25.066,10.065 25.066,8.698 25.066,8.636 ; v1(25.865,8.698) 25.128,8.698 25.066,8.636
  Signal_T w0.229: 13.554,7.698 13.697,7.842 U13.C2@13.974,8.118
  Signal_B w0.127: J1.5@24.99,8.5 25.542,8.5 25.737,8.695 25.861,8.695 v1(25.865,8.698)
USB3_MUX_OE: R2.1 U13.D1 U17.15 | length 13.3
  Signal_T w0.117: U17.15@10.02,9.805 10.02,9.144 10.215,8.949 v1(10.215,8.859)
  Signal_T w0.229: v1@14.365,7.715 U13.D1@14.764,7.315
  Signal_INT w0.127: v1@7.592,4.716 8.808,4.716 10.465,6.373 10.465,8.609 v1(10.215,8.859) 11.562,8.859 11.76,8.661 12.471,8.661 13.159,7.974 14.036,7.974 14.277,7.732 v1(14.365,7.732)
  Signal_B w0.127: R2.1@7.013,5.461 7.53,4.944 7.53,4.778 v1@7.592,4.716
  other v1: 7.668,4.818
USB3_MUX_SEL: U13.D3 U17.6 | length 8.1
  Signal_T w0.127: U17.6@10.02,12.205 10.057,12.241 10.057,12.532 10.468,12.943 10.606,12.943 v1(10.668,13.005)
  Signal_T w0.229: v1@14.371,8.516 U13.D3@14.764,8.909
  Signal_INT w0.127: v1(10.668,13.005) 10.668,12.929 12.751,10.846 12.751,9.535 13.392,8.893 14.021,8.893 v1(14.398,8.517)
USB_T\R\S\T\: P2.6 U13.B11 | length 16.3
  Signal_T w0.102: v1(12.393,20.195) 12.393,20.14 11.875,19.622 11.875,17.01 12.233,16.652 12.677,16.652 13.132,16.198 13.132,15.834 13.15,15.816
  Signal_T w0.229: 13.15,15.816 13.15,15.357 13.155,15.351 13.155,15.318 U13.B11@13.164,15.309
  GND_T w0.127: v1(12.393,20.195) v1@12.395,20.193
  Signal_INT w0.127: v1(12.393,20.195) 12.426,20.195 12.703,20.472 14.779,20.472 15.106,20.8 v1(15.106,26.641)
  Signal_B w0.127: P2.6@14.275,25.425 14.275,25.742 15.106,26.574 v1(15.106,26.641)
USB_TCK: P2.2 U13.F6 | length 19
  Signal_T w0.229: U13.F6@16.366,11.313 v1@16.778,11.725
  Signal_INT w0.127: v1(16.766,11.712) 16.174,12.304 16.174,15.564 15.956,15.783 15.956,19.943 16.154,20.142 16.154,24.206 18.032,26.084 18.874,26.084 v1(19.431,26.641)
  Signal_B w0.127: P2.2@19.355,25.425 19.393,25.463 19.393,26.603 v1(19.431,26.641)
USB_TDI: P2.3 U13.E7 | length 19
  Signal_T w0.229: v1(15.172,11.709) 15.172,11.713 15.564,12.105 U13.E7@15.564,12.109
  Signal_INT w0.127: v1(15.172,11.709) 15.172,11.717 15.92,12.465 15.92,14.91 15.125,15.705 15.125,19.566 15.873,20.314 15.873,24.434 18.048,26.609 18.318,26.609 v1(18.35,26.641)
  Signal_B w0.127: P2.3@18.085,25.425 18.085,26.376 v1(18.35,26.641)
USB_TDO: P2.5 U13.C10 | length 17.6
  Signal_T w0.229: v1@13.562,14.104 13.562,14.107 U13.C10@13.964,14.509
  Signal_INT w0.127: v1(13.562,14.109) 13.562,14.94 12.491,16.011 12.491,19.505 13.204,20.218 14.925,20.218 15.365,20.658 15.365,25.829 v1@16.18,26.645
  Signal_B w0.127: P2.5@15.545,25.425 15.545,25.911 16.188,26.554 v1(16.188,26.641)
USB_TMS: P2.4 U13.E8 | length 17.8
  Signal_T w0.229: v1(15.172,12.509) 15.172,12.513 15.564,12.905 U13.E8@15.564,12.909
  Signal_INT w0.127: v1(15.172,12.509) 15.172,12.528 15.666,13.022 15.666,14.655 14.783,15.539 14.783,19.583 15.619,20.419 15.619,24.813 17.358,26.552 v1@17.475,26.67
  Signal_B w0.127: P2.4@16.815,25.425 16.815,25.938 17.207,26.331 17.207,26.579 v1(17.269,26.641)
VUSB: J2.A4 J2.A9 J2.B4 J2.B9 U12.1 | length 19.9
  Signal_T w0.178: v1(0.889,9.423) v1@0.941,9.475 ; v1@1.219,9.934 v1(1.219,10.008) 1.219,10.081 1.383,10.245 1.383,11.137 1.248,11.272 v1(1.248,11.362)
  Signal_T w0.203: v1(1.264,14.926) 1.311,14.974 1.311,15.166 1.396,15.252 1.396,16.003
  Signal_T w0.254: v1(1.248,11.362) 1.246,11.364 1.232,11.364 v1(1.294,11.938) 1.321,11.912 2,11.912 J2.B4@2.023,11.889 J2.A9@3.683,11.889 ; v1(1.264,14.926) v1@1.279,14.911 ; v1@1.279,14.392 v1(1.294,14.376) J2.B9@2.023,14.389 J2.A4@3.683,14.389
  Signal_T w0.381: v1@0.941,9.475 0.941,9.656 v1@1.219,9.934 ; v1@1.279,14.392 v1@1.279,14.911 ; v1(1.294,13.175) 1.284,13.185 1.284,13.786 v1(1.274,13.797) 1.284,13.807 1.284,14.366 v1(1.294,14.376)
  Signal_T w0.508: v1(1.264,16.202) 0.432,17.034 0.432,19.71 0.737,20.015 2.692,20.015 3.084,20.406 U12.1@3.084,21.341
  GND_T w0.254: v1@1.288,11.932 v1(1.294,11.938)
  Signal_B w0.381: v1@1.28,13.242 v1@1.28,14.943
  other v1: 0.377,17.952 1.799,17.952 0.377,18.815 1.85,19.044 0.377,19.603 1.367,19.857 2.053,19.857 2.739,19.857 3.686,19.875 0.631,20.06 1.037,20.32 1.672,20.32 2.383,20.32 3.15,20.32 0.377,20.517 3.711,21.983
pads on no net: C1.0 C2.0 C3.0 C4.0 C5.0 C6.0 C7.0 C8.0 C9.0 C10.0 C11.0 C12.0 C13.0 C14.0 C15.0 C17.0 C18.0 C19.0 C20.0 C21.0 C22.0 C23.0 C24.0 C25.0 C26.0 C27.0 C28.0 C29.0 C30.0 C34.0 C35.0 C36.0 C37.0 C38.0 C39.0 C40.0 C42.0 C87.0 C88.0 C89.0 C90.0 FB1.0 FB2.0 FB3.0 FB4.0 J2.1 J2.A8 J2.B8 LED1.0 R1.0 R2.0 R3.0 R4.0 R5.0 R6.0 R8.0 R9.0 R10.0 R11.0 R12.0 R13.0 R14.0 R15.0 R16.0 R17.0 U7.0 U11.0 U12.0 U12.4 U13.A11 U13.C4 U13.C9 U13.D2 U13.D4 U13.D6 U13.D7 U13.E10 U13.F2 U13.G5 U13.H5 U13.H7 U13.J5 U13.K5 U13.K6 U13.K7 U13.L8 U15.1 U15.2 U15.9 U15.10 U16.0 U16.1 U16.2 U20.0 U20.4 X1.2 X1.4
copper on no net: | length 0
  Signal_T w0.117: 20.364,12.909 20.371,12.909 20.377,12.909
  Signal_T w0.127: 16.364,8.109 16.364,8.123
  Signal_T w0.229: 14.755,12.113 14.763,12.113 14.765,12.115

## Polygon pours and split planes (outlines as drawn)
1V8 on PWR "1V8_L03_P090" (solid, pour order 90): 8.204,2.235 15.951,2.235 25.502,2.235 25.502,19.568 22.244,22.479 14.859,22.479 14.859,20.523 13.362,20.523 13.358,17.907 17.399,17.907 17.399,15.215 20.706,15.215 20.706,13.474 21.514,13.474 21.484,9.674 21.016,9.674 21.016,7.254 19.786,5.944 17.266,5.944 17.266,8.941 10.941,8.941 10.941,5.715 8.233,5.715
1V2 on PWR "1V2_L03_P010" (solid, pour order 10): 9.703,26.89 14.916,26.89 14.91,20.498 13.411,20.498 13.411,18.009 17.399,18.009 17.399,15.215 18.455,15.215 18.444,16.473 19.075,16.473 19.495,15.882 19.495,15.062 20.713,15.062 20.713,13.483 21.514,13.483 21.514,8.687 21.016,8.687 21.016,7.216 19.495,5.695 16.993,5.695 16.993,9.042 10.921,9.042 10.921,5.695 8.204,5.695 8.204,22.885 9.703,22.885
GND on PWR "GND_L03_P125" (solid, pour order 125): 8.204,0 25.73,0 ccw(c25.73,1.27) 27,1.27 27,17.746 ccw(c26.89,17.746) 26.89,17.856 25.601,17.856 ccw(c25.601,17.757) 25.502,17.757 25.502,4.775 cw(c22.962,4.775) 22.962,2.235 8.204,2.235
+5V on PWR "+5V_L03_P007" (solid, pour order 7): 9.119,27 25.73,27 cw(c25.73,25.73) 27,25.73 27,17.856 22.435,17.856 20.32,19.05 20.32,24.435 9.119,24.435
+5V on PWR "+5V_L03_P086" (solid, pour order 86): 3.912,27 9.703,27 9.703,22.885 8.204,22.885 8.204,2.235 8.204,0 1.27,0 cw(c1.27,1.27) 0,1.27 0,7.671 5.029,7.671 5.029,17.551 3.912,17.551
GND on PWR "GND_L03_P121" (solid, pour order 121): 14.68,27.002 25.728,27.002 cw(c25.728,25.73) 27,25.73 27,20.345 24.737,20.345 22.313,22.479 14.68,22.479
no net on PWR "NONET_L03_P115" (solid, pour order 115): 14.68,27.002
no net on PWR "NONET_L03_P114" (solid, pour order 114): 23.444,4.562
VUSB on PWR "VUSB_L03_P085" (solid, pour order 85): 0,24.435 3.912,24.435 3.912,17.551 5.029,17.551 5.029,7.671 0,7.671
no net on PWR "NONET_L03_P083" (solid, pour order 83): 19.888,6.35
1V2 on PWR "1V2_L03_P079" (solid, pour order 79): 9.042,36.601
no net on PWR "NONET_L03_P020" (solid, pour order 20): 2.819,6.248
no net on PWR "NONET_L03_P017" (solid, pour order 17): 6.864,12.237
no net on PWR "NONET_L03_P012" (solid, pour order 12): 6.864,12.237
no net on PWR "NONET_L03_P011" (solid, pour order 11): 19.279,10.871
GND on Signal_T "GND_L01_P123" (solid, pour order 123): 0,6.706 0,1.27 ccw(c1.27,1.27) 1.27,0 25.73,0 ccw(c25.73,1.27) 27,1.27 27,18.364 ccw(c26.975,18.364) 26.975,18.39 21.197,18.39 ccw(c21.197,17.856) 20.663,17.856 20.663,7.963 cw(c19.787,7.963) 19.787,7.087 0.381,7.087 ccw(c0.381,6.706)
GND on Signal_T "GND_L01_P120" (solid, pour order 120): 25.73,27 cw(c25.73,25.73) 27,25.73 27,17.856 20.663,17.856 20.663,15.545 11.862,15.545 11.862,15.824 11.036,16.481 10.566,16.907 10.566,17.795 9.915,18.447 6.492,18.447 6.492,26.99 6.502,27
1V2 on Signal_T "1V2_L01_P112" (solid, pour order 112): 10.058,24.384 14.884,24.384 14.884,20.447 13.487,20.447 13.487,20.193 12.177,20.19 12.177,18.263 10.099,18.263 10.084,20.523
GND on Signal_T "GND_L01_P103" (solid, pour order 103): 0,6.706 0,17.641 6.942,17.641 6.942,15.809 6.223,15.09 6.223,12.878 5.893,12.548 5.893,9.525 6.02,9.525 7.061,8.484 8.052,8.484 8.331,8.204 8.331,7.95 8.687,7.595 9.881,7.595 10.82,8.534 11.862,8.534 11.862,6.68
+5V on Signal_T "+5V_L01_P102" (solid, pour order 102): 3.073,8.153 5.563,8.153 5.563,6.68 8.204,6.68 8.204,2.54 3.073,2.54
1V8 on Signal_T "1V8_L01_P098" (solid, pour order 98): 12.522,0.813 16.739,0.813 16.739,5.893 13.691,5.893 13.691,7.112 11.557,7.112 11.557,5.512 12.522,5.512
+5V on Signal_T "+5V_L01_P084" (solid, pour order 84): 2.108,19.609 3.876,19.609 3.876,27 9.703,27 9.703,23.52 6.942,23.52 6.942,17.641 2.108,17.641
VUSB on Signal_T "VUSB_L01_P081" (solid, pour order 81): 0,20.853 2.565,20.853 2.565,22.174 3.912,22.174 3.912,19.609 2.108,19.609 2.108,16.104 0,16.104
+5V on Signal_T "+5V_L01_P035" (solid, pour order 35): 26.945,17.888 20.316,17.888 20.316,19.768 26.945,19.768
no net on Signal_T "NONET_L01_P109" (solid, pour order 109): 6.579,17.628
no net on Signal_T "NONET_L01_P100" (solid, pour order 100): 8.585,-0.508
GND on Signal_T "GND_L01_P088" (solid, pour order 88): 0,20.853 3.962,20.853 3.962,27 1.27,27 ccw(c1.27,25.73) 0,25.73
no net on Signal_T "NONET_L01_P080" (solid, pour order 80): 56.142,26.162
+5V on Signal_T "+5V_L01_P077" (solid, pour order 77): -3.002,1.473
no net on Signal_T "NONET_L01_P042" (solid, pour order 42): 23.317,7.442
GND on Signal_INT "GND_L04_P122" (solid, pour order 122): 1.27,0 cw(c1.27,1.27) 0,1.27 0,25.73 cw(c1.27,25.73) 1.27,27 25.73,27 cw(c25.73,25.73) 27,25.73 27,1.27 cw(c25.73,1.27) 25.73,0
no net on Signal_INT "NONET_L04_P049" (solid, pour order 49): 46.584,28.702
+5V on Signal_INT "+5V_L04_P045" (solid, pour order 45): 28.854,26.492
GND on Signal_B "GND_L06_P119" (solid, pour order 119): 25.73,27 cw(c25.73,25.73) 27,25.73 27,16.104 10.262,16.104 9.296,17.069 6.807,17.069 6.223,17.653 6.223,27
1V2 on Signal_B "1V2_L06_P113" (solid, pour order 113): 10.236,22.555 14.859,22.555 14.859,20.447 12.903,20.447 12.903,17.157 10.236,17.157
GND on Signal_B "GND_L06_P110" (solid, pour order 110): 6.315,5.451 8.433,7.569 9.906,7.569 10.312,7.976 10.262,8.026 10.262,17.221 27,17.221 27,5.462
GND on Signal_B "GND_L06_P107" (solid, pour order 107): 0,5.969 5.69,5.969 2.946,8.712 2.946,9.906 1.753,11.1 1.753,15.367 3.835,17.45 6.96,17.45 6.96,27 1.27,27 ccw(c1.27,25.73) 0,25.73
GND on Signal_B "GND_L06_P106" (solid, pour order 106): 1.27,0 cw(c1.27,1.27) 0,1.27 0,6.096 27,6.096 27,1.27 cw(c25.73,1.27) 25.73,0
1V8 on Signal_B "1V8_L06_P097" (solid, pour order 97): 11.379,6.35 11.379,5.376 13.081,5.376 13.081,3.099 15.697,3.099 15.697,5.657 14.115,5.657 14.115,7.335 10.693,7.335 10.693,6.35
+5V on Signal_B "+5V_L06_P089" (solid, pour order 89): 20.244,17.947 26.873,17.947 26.873,19.761 20.244,19.761
+5V on Signal_B "+5V_L06_P111" (solid, pour order 111): 6.96,22.631 8.433,22.631 8.433,25.908 6.96,25.908
no net on Signal_B "NONET_L06_P108" (solid, pour order 108): 6.756,6.096
GND on GND_T "GND_L02_P124" (solid, pour order 124): 1.27,0 cw(c1.27,1.27) 0,1.27 0,25.73 cw(c1.27,25.73) 1.27,27 25.73,27 cw(c25.73,25.73) 27,25.73 27,1.27 cw(c25.73,1.27) 25.73,0
no net on GND_T "NONET_L02_P117" (solid, pour order 117): 1.27,27
GND on GND_B "GND_L05_P126" (solid, pour order 126): 1.27,0 25.73,0 ccw(c25.73,1.27) 27,1.27 27,25.73 ccw(c25.73,25.73) 25.73,27 1.27,27 ccw(c1.27,25.73) 0,25.73 0,1.27 ccw(c1.27,1.27)
1V8 on GND_B "1V8_L05_P118" (solid, pour order 118): 15.469,15.342 15.469,20.777 12.979,20.777 12.979,15.342

## Keep-outs
Keep-Out Layer:
  lines w0.02: 0,1.27 ccw(c1.27,1.27) 1.27,0 3.937,0 21.082,0 25.73,0 ccw(c25.73,1.27) 27,1.27 27,5.918 27,23.038 27,25.73 ccw(c25.73,25.73) 25.73,27 23.038,27 1.854,27 1.27,27 ccw(c1.27,25.73) 0,25.73 0,25.146 0,3.937 0,1.27

## Other copper
Signal_T:
  pour cut-out: 20.661,15.586 20.661,7.051 11.86,7.051 11.86,15.586

## Silkscreen, mask and mechanical layers (free items; w line width, h text height)
Top Overlay:
  text "1V2" at 10.871,20.447 h1.02
  text "GND" at 25.622,13.658 h0.38 r180
  text "RX" at 26.769,11.586 h0.56 r180
  text "TX" at 26.779,10.26 h0.56 r180
  text "1V8" at 16.205,1.981 h1.02 r90
Bottom Overlay:
  text "TRST" at 9.068,26.772 h0.51 r90
  text "TDO" at 9.982,26.602 h0.64 r90
  text "TMS" at 10.82,26.602 h0.64 r90
  text "TCK" at 12.548,26.602 h0.64 r90
  text "GND" at 13.513,26.602 h0.64 r90
  text "TDI" at 11.633,26.391 h0.64 r90
  text "+5V" at 24.841,21.006 h1.02
  text "CircuitValley.com" at 4.457,1.051 h0.81 r180
Top Solder:
  text "FX3 V1.0" at 17.17,2.349 h1.14
  text "2151" at 17.093,1.536 h1.14
Mechanical 15:
  the board outline again, w0.025